# Altium PCB WoodStoveLayout1.PcbDoc (part 2 of 4)
Units mil, origin at the board's own origin, x right, y up, seen from the top; angles counter-clockwise.
Board outline 4000 x 3000 mil, 4 copper layers (Top Layer, L2, L3, Bottom Layer), stack 64.6 mil thick; 132 components, 92 nets, 551 pads, 53 vias.
Unrouted connection lines stored in the file: 224.
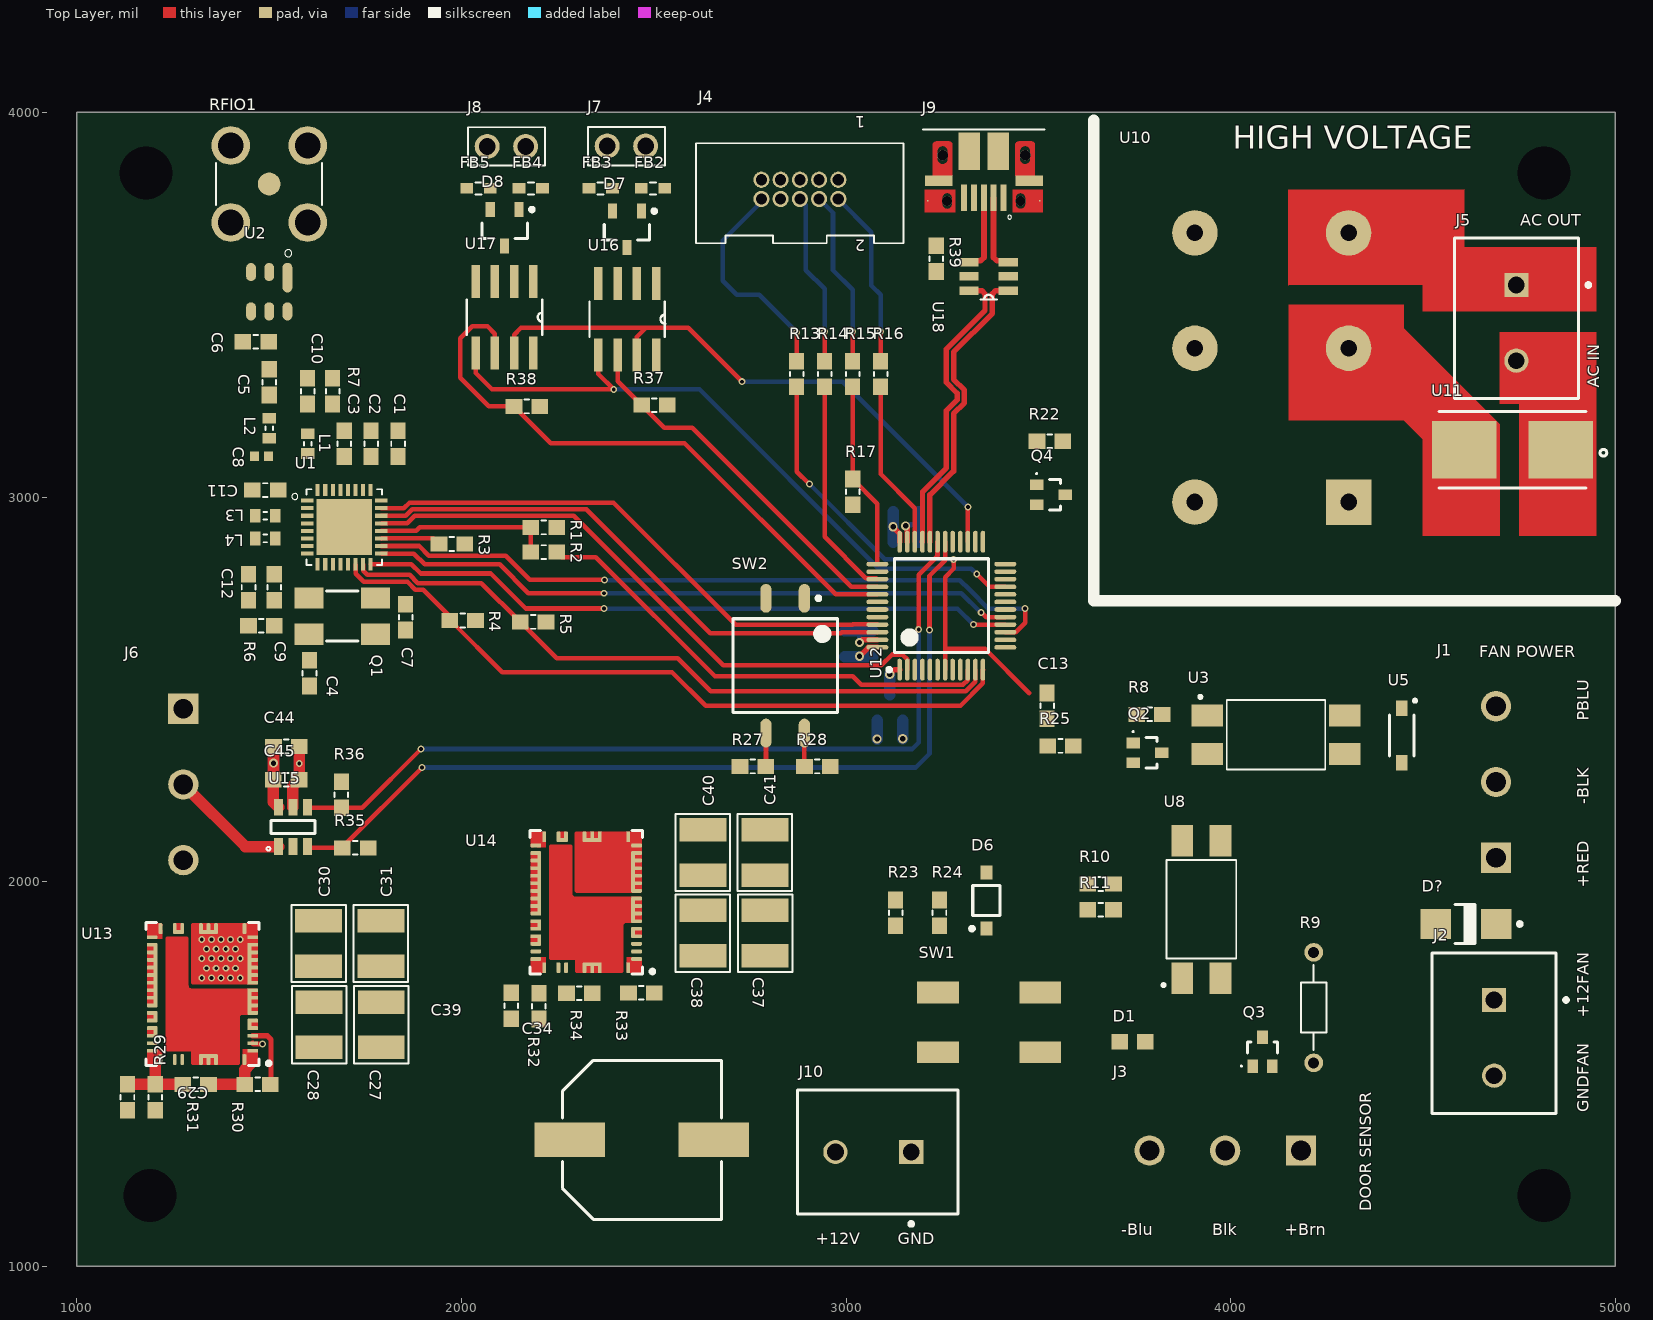
[diagram p0: Top Layer view]

## Part data (continued)
C12 C44: Capacitance=10nF, Case/Package=0603, Case Code (Metric)=1608, Dielectric=X7R, Dielectric Material=Ceramic, Insulation Resistance=10GR, Manufacturer=Murata, Manufacturer Part Number=GRM188R71H103KA01D, Max Operating Temperature=125°C, Min Operating Temperature=-55°C, Package Quantity=1, Supplier Part Number 1=490-1512-1-ND, Tolerance=10%, Voltage=50V, Case Code (Imperial)=0603, ComponentLink1Description=https://datasheet.ciiva.com/129/product-129872.pdf, ComponentLink1URL=https://datasheet.ciiva.com/129/product-129872.pdf, ComponentLink2Description=https://datasheet.ciiva.com/11786/0900766b8003061f-11786516.pdf, ComponentLink2URL=https://datasheet.ciiva.com/11786/0900766b8003061f-11786516.pdf, ComponentLink3Description=https://datasheet.ciiva.com/7937/4360-7937654.pdf, ComponentLink3URL=https://datasheet.ciiva.com/7937/4360-7937654.pdf, ComponentLink4Description=https://datasheet.ciiva.com/7937/1747461-7937655.pdf, ComponentLink4URL=https://datasheet.ciiva.com/7937/1747461-7937655.pdf, ComponentLink5Description=https://datasheet.ciiva.com/7937/1747461-7937656.pdf, ComponentLink5URL=https://datasheet.ciiva.com/7937/1747461-7937656.pdf, ComponentLink6Description=https://datasheet.ciiva.com/28534/1769893-28534235.pdf, ComponentLink6URL=https://datasheet.ciiva.com/28534/1769893-28534235.pdf, ComponentLink7Description=https://datasheet.ciiva.com/129/partnumbering-e-01-129870.pdf, ComponentLink7URL=https://datasheet.ciiva.com/129/partnumbering-e-01-129870.pdf, ComponentLink8Description=https://datasheet.ciiva.com/48428/nmgrm-data-en-48428590.pdf, ComponentLink8URL=https://datasheet.ciiva.com/48428/nmgrm-data-en-48428590.pdf, ComponentLink9Description=https://datasheet.ciiva.com/129/partnumbering-e-01-129871.pdf, ComponentLink9URL=https://datasheet.ciiva.com/129/partnumbering-e-01-129871.pdf, ComponentLink10Description=https://datasheet.ciiva.com/48428/nmgrm-data-en-48428591.pdf, ComponentLink10URL=https://datasheet.ciiva.com/48428/nmgrm-data-en-48428591.pdf, ComponentLink11Description=https://datasheet.ciiva.com/29202/451715-da-01-en-vs-kondensator-0603-29202047.pdf, ComponentLink11URL=https://datasheet.ciiva.com/29202/451715-da-01-en-vs-kondensator-0603-29202047.pdf, Depth=0.8mm, Height=0.8mm, Lead Free="Lead Free", Length=1.6mm, Material=Ceramic, Mount="Surface Mount", Number of Pins=2, Packaging="Tape and Reel", Pricing 1="1=0.1, 10=0.06, 100=0.0266, 500=0.019 (USD)", REACH SVHC=Unknown, Stock 1=0, Supplier 1=Digi-Key, Termination=SMD/SMT, Thickness=0.035inch, Voltage Rating=50V, Voltage Rating (DC)=50V, Width=0.031inch